# EAGLE board Powerboard (EAGLE 9.6.2)
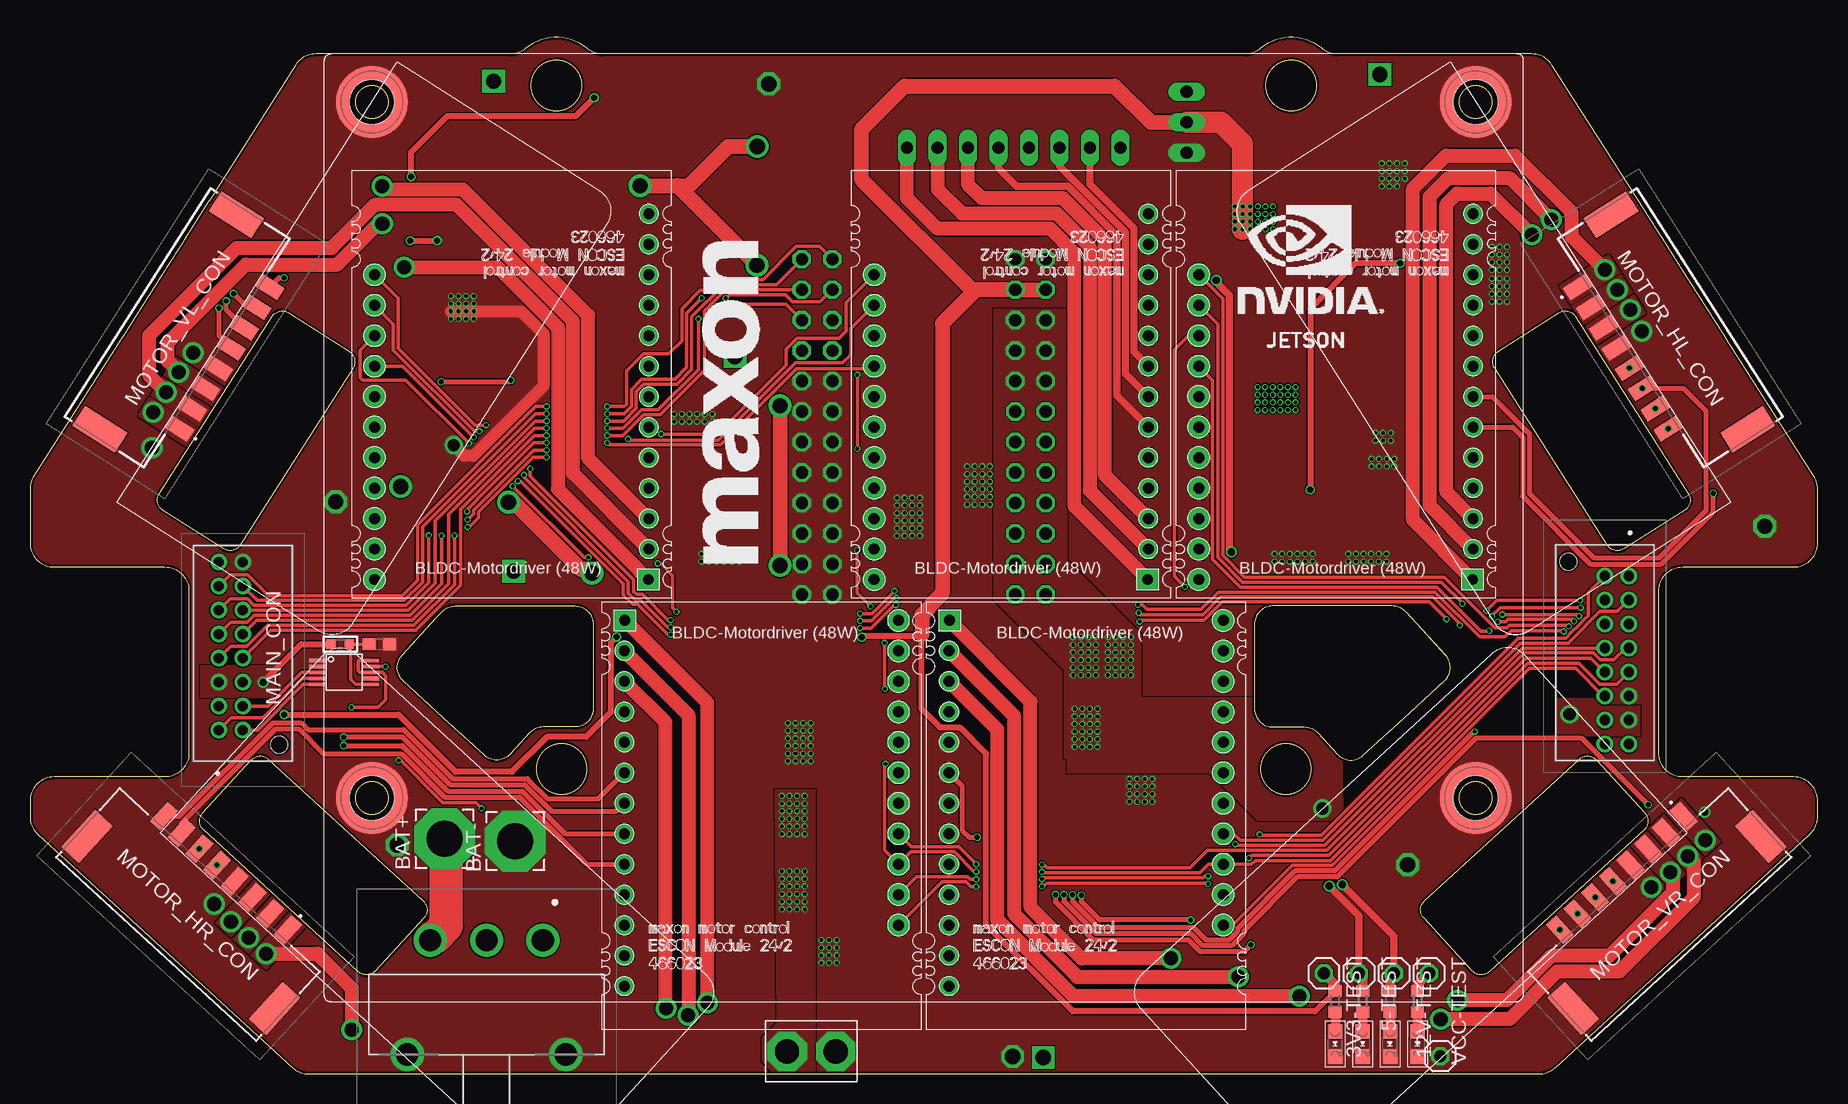
[diagram p0: board, top side]
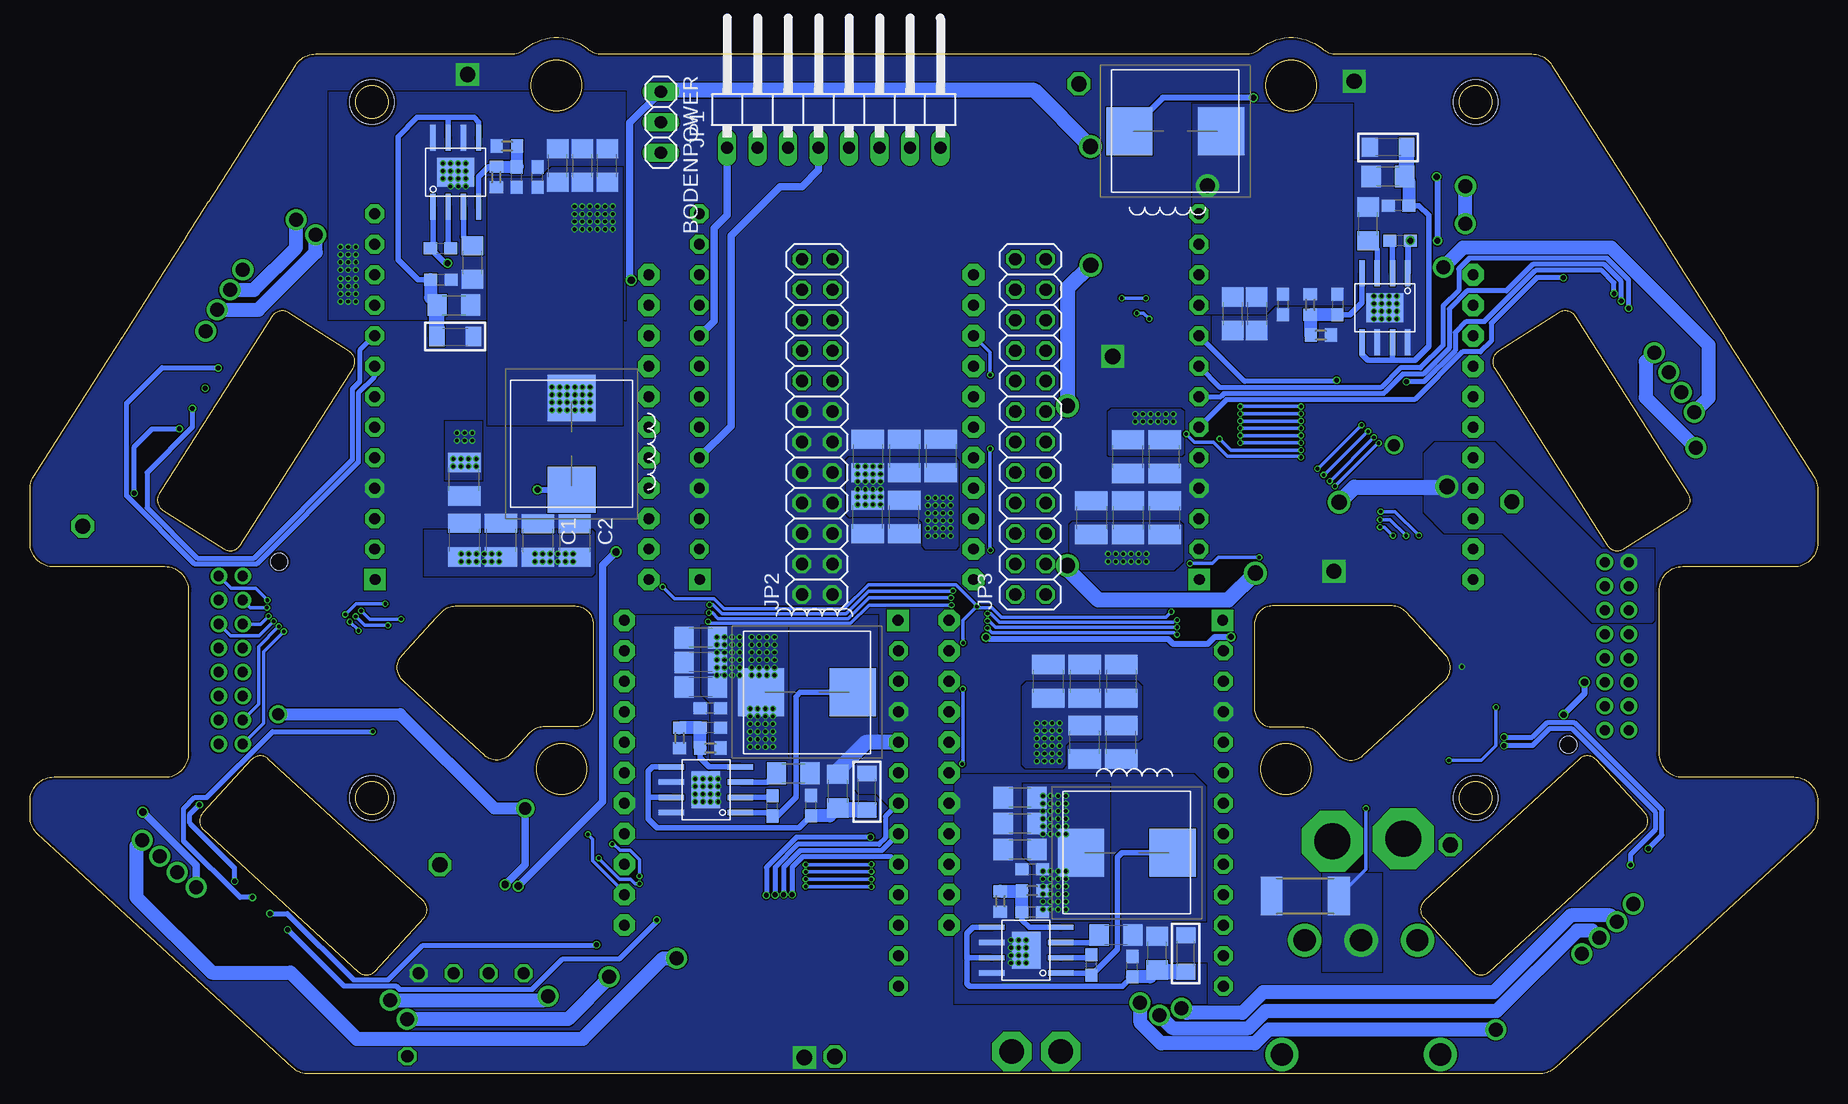
[diagram p1: board, bottom side, seen from below]

Size 149.01 x 86.37 mm. Coordinates in mm from the lower left corner, seen from the top.
Outline: 137.87,66.81 141.34,61.36 arc1 141.37,61.3 148.7,49.81 arc-32 149.01,48.74 149.01,44.25 arc-90 147.01,42.25 137.76,42.25 arc90 135.76,40.25 135.76,26.75 arc90 137.76,24.75 147.01,24.75 arc-90 149.01,22.75 149.01,21.45 arc-48 148.36,19.98 146.01,17.82 127.13,0.52 arc-42 125.78,0 23.23,0 arc-42 21.88,0.52 3,17.82 0.65,19.98 arc-48 0,21.45 0,22.75 arc-90 2,24.75 11.25,24.75 arc90 13.25,26.75 13.25,40.25 arc90 11.25,42.25 2,42.25 arc-90 0,44.25 0,48.74 arc-32 0.31,49.81 7.64,61.3 arc1 7.67,61.36 11.14,66.81
Outline: 137.87,66.81 137.87,66.81
Outline: 137.87,66.81 136.01,69.73 arc0 136.01,69.72 135.96,69.8 arc0 135.97,69.79 134.11,72.71 arc-1 134.09,72.74 126.87,84.08 arc58 125.18,85 108.95,85 arc-40 107.68,85.46 arc79 102.58,85.46 arc-40 101.3,85 47.71,85 arc-40 46.43,85.46 arc79 41.33,85.46 arc-40 40.06,85 23.83,85 arc58 22.14,84.08 14.92,72.74 arc-1 14.9,72.71 13.04,69.79 arc0 13.05,69.8 13,69.72 arc0 13,69.73 11.14,66.81
Outline: 11.14,66.81 11.14,66.81
Outline: 115.14,38 114.68,38.51 arc48 113.57,39 103.57,39 arc90 102.07,37.5 102.07,30.42 arc90 103.57,28.92 106.25,28.92 arc-48 107.35,28.43 109,26.64 arc90 111.12,26.54 114.51,29.66 117.91,32.77 arc90 118,34.88 115.14,38
Outline: 115.14,38 118.01,34.87
Outline: 33.87,38 34.33,38.51 arc-48 35.44,39 45.43,39 arc-90 46.93,37.5 46.93,30.42 arc-90 45.43,28.92 42.76,28.92 arc48 41.66,28.43 40.01,26.64 arc-90 37.89,26.54 34.5,29.66 31.1,32.77 arc-90 31.01,34.88 33.87,38
Outline: 33.87,38 31,34.87
Outline: 116.24,14.42 129.14,26.24 arc-90 130.55,26.18 134.61,21.75 arc-90 134.54,20.34 121.64,8.52 arc-90 120.23,8.58 116.18,13 arc-90 116.24,14.42
Outline: 122.39,60.21 127.45,63.43 arc-90 128.83,63.12 138.23,48.36 arc-90 137.93,46.98 132.87,43.76 arc-90 131.49,44.07 122.08,58.83 arc-90 122.39,60.21
Outline: 21.56,63.43 26.62,60.21 arc-90 26.93,58.83 17.52,44.07 arc-90 16.14,43.76 11.08,46.98 arc-90 10.78,48.36 20.18,63.12 arc-90 21.56,63.43
Outline: 19.87,26.24 32.77,14.42 arc-90 32.83,13 28.78,8.58 arc-90 27.37,8.52 14.47,20.34 arc-90 14.4,21.75 18.46,26.18 arc-90 19.87,26.24
Outline: circle at 105.13,82.38 radius 2.1
Outline: circle at 104.69,25.42 radius 2.1
Outline: circle at 120.5,23 radius 1.38
Outline: circle at 120.5,81 radius 1.38
Outline: circle at 28.5,81 radius 1.38
Outline: circle at 28.5,23 radius 1.38
Outline: circle at 44.32,25.42 radius 2.1
Outline: circle at 43.88,82.38 radius 2.1
Copper layers (1*16): Top 0.035mm / dielectric 1.55mm / Bottom 0.035mm
Design rules "4L_druMCB_Powerboard *": minimum track width 0.1mm, minimum drill 0.2mm, track to track 0.1mm, track to pad 0.1mm, pad to pad 0.1mm, via to via 0.1mm, smd to smd 0mil, copper to edge 0.2mm, drill to drill 0.2mm, minimum pad ring 0.125mm, minimum via ring 0.1mm, stop-mask expansion 2mil, vias tented up to drill 0.45mm, thermal gap 0.2mm
Net classes: 2 power: width 0.406 mm, drill 0.5 mm, clearance 0.15 mm

## Footprints (pad centres in the part's own frame; a part is rotated, then mirrored left to right if it is on the bottom)
1X01 = drill 1.016 octagon: 1 0,0
5,08/3 = drill 3 pad 5.08 octagon: P$1 0,0
1X03 = drill 1.016 long: 1 -2.54,0; 2 0,0; 3 2.54,0
C1210 = smd 1.6 x 2.7: 1 -1.4,0; 2 1.4,0
C0603 = smd 1.1 x 1: 1 -0.85,0; 2 0.85,0
C1206 = smd 1.6 x 1.8: 1 -1.4,0; 2 1.4,0
TIGERS_DGS_S-PDSO-G10 = smd 0.3 x 1.45: 1 -1,-2.2; 2 -0.5,-2.2; 3 0,-2.2; 4 0.5,-2.2; 5 1,-2.2; 6 1,2.2; 7 0.5,2.2; 8 0,2.2; 9 -0.5,2.2; 10 -1,2.2
TIGERS_DDA_R-PDSO-G8 = smd 0.45 x 2.15: 1 -1.905,-2.875; 2 -0.635,-2.875; 3 0.635,-2.875; 4 1.905,-2.875; 5 1.905,2.875; 6 0.635,2.875; 7 -0.635,2.875; 8 -1.905,2.875 | smd 3.1 x 2.4: PAD 0,0
WA-SMSI_9774100151 = smd 6 x 6: 1 0,0 | hole 3.7: 0,0
1X08/90 = drill 1.016 long: 1 -8.89,-3.81; 2 -6.35,-3.81; 3 -3.81,-3.81; 4 -1.27,-3.81; 5 1.27,-3.81; 6 3.81,-3.81; 7 6.35,-3.81; 8 8.89,-3.81
2X12 = drill 1.016 octagon: 1 -13.97,-1.27; 2 -13.97,1.27; 3 -11.43,-1.27; 4 -11.43,1.27; 5 -8.89,-1.27; 6 -8.89,1.27; 7 -6.35,-1.27; 8 -6.35,1.27; 9 -3.81,-1.27; 10 -3.81,1.27; 11 -1.27,-1.27; 12 -1.27,1.27; 13 1.27,-1.27; 14 1.27,1.27; 15 3.81,-1.27; 16 3.81,1.27; 17 6.35,-1.27; 18 6.35,1.27; 19 8.89,-1.27; 20 8.89,1.27; 21 11.43,-1.27; 22 11.43,1.27; 23 13.97,-1.27; 24 13.97,1.27
L0603 = smd 0.8 x 0.8: 1 -0.762,0; 2 0.762,0
L1206 = smd 1.3 x 1.6: 1 -1.524,0; 2 1.524,0
7443251600_WE-HCI_105023 = smd 3.85 x 4: 1 -3.825,0; 2 3.825,0
POWER_DISTRIBUTION_CHIPLED_0805 = smd 1.2 x 1.2: A 0,-1.05; C 0,1.05
501645-1620_5016451620 = drill 0.85 pad 1.381: 1 -5.85,2; 2 -5.85,0; 3 -3.85,2; 4 -3.85,0; 5 -1.85,2; 6 -1.85,0; 7 0.15,2; 8 0.15,0; 9 2.15,2; 10 2.15,0; 11 4.15,2; 12 4.15,0; 13 6.15,2; 14 6.15,0; 15 8.15,2; 16 8.15,0 | hole 1.4: -7.05,-3.05
MOTOR_CON_VERTICAL = smd 1.2 x 2.2: 1 7,4.68; 2 5,4.68; 3 3,4.68; 4 1,4.68; 5 -1,4.68; 6 -3,4.68; 7 -5,4.68; 8 -7,4.68 | smd 2 x 4.2: MP1 10.6,-0.9; MP2 -10.6,-0.9
R2512 = smd 1.8 x 3.2: 1 -2.8,0; 2 2.8,0
R0603 = smd 1 x 1.1: 1 -0.85,0; 2 0.85,0
500SSP1S1M6QEB = drill 1.85 pad 2.775: 1 0,0; 2 0,4.7; 3 0,9.4; MH1 -9.53,-1.905; MH2 -9.53,11.305
MAXON_ESCON24/2_MODULE = drill 0.9 pad 1.575 octagon: +5V 1.905,-14.2; +VCC 1.905,-9.12; A 1.905,-24.36; A/ 1.905,-26.9; B 1.905,-29.44; B/ 1.905,-31.98; GND 1.905,-11.66; H1 1.905,-16.74; H2 1.905,-19.28; H3 1.905,-21.82; MW2/- 1.905,-4.04; MW3/NC 1.905,-6.58 | drill 0.9 pad 1.8 octagon: A_IN1+ 24.765,-1.5; A_IN1− 24.765,-4.04; A_IN2+ 24.765,-6.58; A_IN2− 24.765,-9.12; A_OUT1 24.765,-11.66; A_OUT2 24.765,-14.2; D_IN1 24.765,-19.28; D_IN2 24.765,-21.82; D_IN/D_OUT3 24.765,-24.36; D_IN/D_OUT4 24.765,-26.9; GND2 24.765,-16.74 | drill 0.9 pad 1.8 square: MW1/+ 1.95,-1.5
PWRJACK = drill 2.032 pad 3.302 octagon: P$1 0,2.032; P$2 0,-2.032

## Placement (x,y rotation side)
3V3-TEST  [1X01]  107.85,8.39 270 top
5-TEST  [1X01]  110.78,8.39 270 top
12V-TEST  [1X01]  113.7,8.39 270 top
BAT+  [5,08/3]  34.55,19.59 90 top
BAT-  [5,08/3]  40.44,19.41 90 top
BODENPOWER  [1X03]  96.42,79.3 270 bottom
C1  47uF  [C1210]  106.69,44.46 270 bottom
C2  47uF  [C1210]  103.61,44.46 270 bottom
C6  100n  [C0603]  29.14,35.82 0 top
C7  10u  [C1206]  81.67,23.57 90 bottom
C8  100n  [C0603]  83.9,22.36 90 bottom
C9  10u  [C1206]  85.39,25.06 0 bottom
C10  1u  [C0603]  87.13,22.35 90 bottom
C11  18p  [C0603]  92.28,28.86 180 bottom
C12  33u  [C1206]  93.1,34.3 180 bottom
C13  33u  [C1206]  93.1,32.24 180 bottom
C14  33u  [C1206]  93.1,36.35 180 bottom
C15  100n  [C0603]  92.28,30.49 180 bottom
C16  10u  [C1206]  55.05,10.06 90 bottom
C17  100n  [C0603]  57.13,8.95 90 bottom
C18  10u  [C1206]  58.48,11.59 0 bottom
C19  1u  [C0603]  60.53,9.07 90 bottom
C20  18p  [C0603]  65.46,13.49 180 bottom
C21  33u  [C1206]  66.48,23.02 180 bottom
C22  33u  [C1206]  66.48,20.86 180 bottom
C23  33u  [C1206]  66.48,18.7 180 bottom
C24  100n  [C0603]  65.46,17.05 180 bottom
C25  10u  [C1206]  113.67,64.06 0 bottom
C26  100n  [C0603]  114.76,66.2 0 bottom
C27  10u  [C1206]  112.15,67.62 270 bottom
C28  10u  [C1206]  35.82,74.78 180 bottom
C29  100n  [C0603]  34.93,72.37 180 bottom
C30  10u  [C1206]  37.47,70.85 90 bottom
C31  1u  [C0603]  34.8,69.45 180 bottom
C32  18p  [C0603]  40.01,64.12 270 bottom
C33  33u  [C1206]  46.74,63.35 270 bottom
C34  33u  [C1206]  48.77,63.35 270 bottom
C36  100n  [C0603]  44.58,64.12 270 bottom
C39  47uF  [C1210]  60.53,46.36 270 bottom
C40  47uF  [C1210]  112.81,44.48 270 bottom
C41  47uF  [C1210]  109.76,44.48 270 bottom
C42  47uF  [C1210]  57.49,46.36 270 bottom
C43  47uF  [C1210]  54.44,46.36 270 bottom
C44  47uF  [C1210]  57.49,51.44 90 bottom
C46  47uF  [C1210]  54.44,51.44 90 bottom
C48  47uF  [C1210]  112.81,49.56 90 bottom
C49  47uF  [C1210]  64.14,32.72 270 bottom
C50  47uF  [C1210]  61.09,32.72 270 bottom
C51  47uF  [C1210]  79.18,46.41 90 bottom
C52  47uF  [C1210]  79.18,51.49 270 bottom
C53  47uF  [C1210]  76.13,46.41 90 bottom
C54  47uF  [C1210]  73.08,51.49 270 bottom
C55  47uF  [C1210]  58.05,32.72 270 bottom
C56  47uF  [C1210]  61.09,27.64 90 bottom
C57  47uF  [C1210]  76.13,51.49 270 bottom
C59  1u  [C0603]  114.79,68.81 0 bottom
C60  75p  [C0603]  108.44,74.73 90 bottom
C61  47u  [C1206]  100.9,75.7 90 bottom
C62  47u  [C1206]  102.95,75.7 90 bottom
C63  47u  [C1206]  105.01,75.7 90 bottom
C64  100n  [C0603]  106.71,74.73 90 bottom
C73  47uF  [C1210]  58.05,27.64 90 bottom
GND_PH  [1X01]  117.56,1.48 0 top
IC3  POWER_INA226  [TIGERS_DGS_S-PDSO-G10]  26.19,33.46 270 top
IC4  LMR23630ADDA  [TIGERS_DDA_R-PDSO-G8]  92.67,23.69 90 bottom
IC5  LMR23630ADDA  [TIGERS_DDA_R-PDSO-G8]  65.97,10.32 90 bottom
IC6  LMR23630ADDA  [TIGERS_DDA_R-PDSO-G8]  113.52,75.14 0 bottom
IC7  LMR23630ADDA  [TIGERS_DDA_R-PDSO-G8]  36.07,63.86 180 bottom
JETSON_MH1  M2.5 x 10mm  [WA-SMSI_9774100151]  28.5,81 0 top
JETSON_MH2  M2.5 x 10mm  [WA-SMSI_9774100151]  28.5,23 0 top
JETSON_MH3  M2.5 x 10mm  [WA-SMSI_9774100151]  120.5,81 0 top
JETSON_MH4  M2.5 x 10mm  [WA-SMSI_9774100151]  120.5,23 0 top
JP1  [1X08/90]  82,81 0 bottom
JP2  [2X12]  83.39,53.93 90 bottom
JP3  [2X12]  65.61,53.93 90 bottom
L1  120R  [L0603]  25.86,35.82 180 top
L2  470R  [L1206]  79.24,23.53 270 bottom
L3  7443251600  [7443251600_WE-HCI_105023]  84.25,31.8 180 bottom
L4  470R  [L1206]  52.66,10.04 270 bottom
L5  7443251600  [7443251600_WE-HCI_105023]  57.59,18.45 180 bottom
L6  470R  [L1206]  113.57,61.45 180 bottom
L7  470R  [L1206]  35.79,77.22 0 bottom
L8  7443251600  [7443251600_WE-HCI_105023]  53.55,78.57 0 bottom
L9  7443251600  [7443251600_WE-HCI_105023]  103.87,52.51 90 bottom
LED1  RED  [POWER_DISTRIBUTION_CHIPLED_0805]  115.65,2.49 180 top
LED2  BLUE  [POWER_DISTRIBUTION_CHIPLED_0805]  113.37,2.49 180 top
LED3  YELLOW  [POWER_DISTRIBUTION_CHIPLED_0805]  111.08,2.49 180 top
LED4  GREEN  [POWER_DISTRIBUTION_CHIPLED_0805]  108.79,2.49 180 top
MAIN_CON  TEENSY_CON_VERTICAL  [501645-1620_5016451620]  17.74,34.5 90 top
MAIN_CON_MOT  TEENSY_CON_VERTICAL  [501645-1620_5016451620]  131.27,35.64 270 top
MOTOR_HL_CON  [MOTOR_CON_VERTICAL]  136.73,62.19 122.5 top
MOTOR_HR_CON  [MOTOR_CON_VERTICAL]  13.16,13.29 317.5 top
MOTOR_VL_CON  [MOTOR_CON_VERTICAL]  12.27,62.19 237.5 top
MOTOR_VR_CON  [MOTOR_CON_VERTICAL]  135.85,13.29 42.5 top
R9  0R002  [R2512]  42.7,14.81 180 bottom
R10  243k 1%  [R0603]  92.28,27.16 0 bottom
R11  22k1 1%  [R0603]  94.86,27.99 90 bottom
R12  243k 1%  [R0603]  65.46,15.27 0 bottom
R13  22k1 1%  [R0603]  68.13,14.38 90 bottom
R14  51k 1%  [R0603]  110.14,74.73 270 bottom
R15  88k7 1%  [R0603]  42.3,64.12 90 bottom
R16  22k1 1%  [R0603]  41.41,61.58 180 bottom
R26  22k1 1%  [R0603]  109.25,77.32 0 bottom
R32  1k  [R0603]  108.79,6.05 90 top
R33  1k  [R0603]  111.08,6.05 90 top
R34  10k  [R0603]  113.37,6.05 90 top
R35  10k  [R0603]  115.65,6.05 90 top
S1  500SSP1S1M6QEB  [500SSP1S1M6QEB]  42.75,11.15 90 top
U$1  MAXON_ESCON24/2  [MAXON_ESCON24/2_MODULE]  47.63,39.3 0 top
U$2  MAXON_ESCON24/2  [MAXON_ESCON24/2_MODULE]  74.7,39.3 0 top
U$3  MAXON_ESCON24/2  [MAXON_ESCON24/2_MODULE]  53.48,39.7 180 top
U$4  MAXON_ESCON24/2  [MAXON_ESCON24/2_MODULE]  122.19,39.7 180 top
U$5  JETSON_ORIN-PWRJACK  [PWRJACK]  65.13,1.89 270 top
U$6  MAXON_ESCON24/2  [MAXON_ESCON24/2_MODULE]  95.12,39.7 180 top
U$10  MAXON_LOGO  [MAXON_LOGO]  60.81,42.6 90 top
U$11  NVIDIA-LOGO  [NVIDIA-LOGO]  85.93,54.77 0 top
VCC-TEST  [1X01]  116.62,8.39 270 top

## Library data of the parts
3V3-TEST 5-TEST 12V-TEST BODENPOWER GND_PH JP1-JP3 VCC-TEST = pinhead
BAT+ BAT- = TIGERs
C1 C2 C6 C8 C10 C11 C15 C17 C19 C20 C24 C26 C29 C31 C32 C36 C39-C44 C46 C48-C57 C59 C60 C64 C73 = rcl; SPICEPREFIX: C
C7 C9 C16 C18 C25 C27 C28 C30 = rcl; SPICEPREFIX: C; VOLTAGE: 50V
C12-C14 C21-C23 C33 C34 C61-C63 = rcl; SPICEPREFIX: C; VOLTAGE: 25V
IC3-IC7 MOTOR_HL_CON MOTOR_HR_CON MOTOR_VL_CON MOTOR_VR_CON = Open24
JETSON_MH1-JETSON_MH4 = Open24; DATASHEET-URL: https://www.we-online.com/catalog/datasheet/9774100151R.pdf; INNER-DIAMETER: 3.5mm; INNER-THREAD-LENGTH: -; OUTER-DIAMETER: 5.1mm; PART-NUMBER: 9774100151R; PIN-LENGTH: 10mm; THREAD: M2.5
L1 = rc-master-smd
L2 L4 L6 L7 = rc-master-smd; IMAX: 4A
L3 L5 L8 L9 = Open24; DESCRIPTION: SMD-Flat Wire High Current Inductor WE-HCI; HEIGHT: mm; MANUFACTURER_NAME: Wurth Elektronik; MANUFACTURER_PART_NUMBER: 7443251600; MOUSER_PART_NUMBER: 710-7443251600; MOUSER_PRICE-STOCK: https://www.mouser.co.uk/ProductDetail/Wurth-Elektronik/7443251600?qs=VxkwJfKV0FSkbbPOgC7FsA%3D%3D
LED1-LED4 = Open24; MF: Würth Elektronik; MPN: 150080RS75000
MAIN_CON MAIN_CON_MOT = Open24; DESCRIPTION: MOLEX - 501645-1620 - CONNECTOR, HEADER, 16POS, 2ROW, 2MM; HEIGHT: 12mm; MANUFACTURER_NAME: Molex; MANUFACTURER_PART_NUMBER: 501645-1620; MOUSER_PART_NUMBER: 538-501645-1620; MOUSER_PRICE-STOCK: https://www.mouser.co.uk/ProductDetail/Molex/501645-1620?qs=AcmJtBVhzkSktNjjA6%2Faug%3D%3D
R9-R16 R26 R32-R35 = rcl; SPICEPREFIX: R
S1 = schalter; DESCRIPTION: SLIDE, 5A 120VAC/28VDC, SPDT On-On, Through Hole, Right Angle PC Pin; HEIGHT: 6.1mm; MANUFACTURER_NAME: E-Switch; MANUFACTURER_PART_NUMBER: 500SSP1S1M6QEB; MOUSER_PART_NUMBER: 612-500SSP1S1M6QEB; MOUSER_PRICE-STOCK: https://www.mouser.co.uk/ProductDetail/E-Switch/500SSP1S1M6QEB?qs=0JU57JYmZjtvO38dJ0sbfg%3D%3D
U$1-U$4 U$6 = Motortreiber_MaxonESCON24-2
U$5 = Power
U$10 U$11 = Sponsorenlogos

## Nets
+3V3: 3V3-TEST.1 BODENPOWER.2 C60.1 C61.1 C62.1 C63.1 C64.1 JP2.21 JP2.22 L1.2 L9.2 MAIN_CON.5 R14.2 R32.2
+5V: 5-TEST.1 BODENPOWER.1 C32.1 C33.1 C34.1 C36.1 L8.2 MAIN_CON.15 R15.2 R33.2
+12V: 12V-TEST.1 C11.1 C12.1 C13.1 C14.1 C15.1 JP2.15 JP2.16 JP2.17 JP2.18 JP2.19 JP2.20 L3.2 MAIN_CON_MOT.13 R10.2 R34.2
ALRT: IC3.3 MAIN_CON.4
BAT_SENSE2: IC3.8 IC3.10 R9.1 S1.2
BOOT_5V: C31.2 IC7.2
BOOT_12V_1: C10.2 IC4.2
BOOT_12V_2: C19.2 IC5.2
BOOT_12V_4: C59.2 IC6.2
CHIP: JP3.21 MAIN_CON.8
DRIBBLER_DIR: MAIN_CON.9 U$6.D_IN/D_OUT3
DRIBBLER_DOUT: MAIN_CON.7 U$6.D_IN/D_OUT4
DRIBBLER_PWM: MAIN_CON.11 U$6.D_IN1
DRIVE_EN: MAIN_CON_MOT.9 U$1.D_IN2 U$2.D_IN2 U$3.D_IN2 U$4.D_IN2 U$6.D_IN2
EN_HV: JP3.23 MAIN_CON.12
FB_3V3: C60.2 IC6.4 R14.1 R26.2
FB_5V: C32.2 IC7.4 R15.1 R16.2
FB_12V_1: C11.2 IC4.4 R10.1 R11.2
FB_12V_2: C20.2 IC5.4 R12.1 R13.2
GND: BAT-.P$1 BODENPOWER.3 C1.2 C2.2 C6.2 C7.2 C8.2 C9.2 C12.2 C13.2 C14.2 C15.2 C16.2 C17.2 C18.2 C21.2 C22.2 C23.2 C24.2 C25.2 C26.2 C27.2 C28.2 C29.2 C30.2 C33.2 C34.2 C36.2 C39.2 C40.2 C41.2 C42.2 C43.2 C44.2 C46.2 C48.2 C49.2 C50.2 C51.2 C52.2 C53.2 C54.2 C55.2 C56.2 C57.2 C61.2 C62.2 C63.2 C64.2 C73.2 GND_PH.1 IC3.1 IC3.2 IC3.7 IC4.6 IC4.8 IC4.PAD IC5.6 IC5.8 IC5.PAD IC6.6 IC6.8 IC6.PAD IC7.6 IC7.8 IC7.PAD JETSON_MH1.1 JETSON_MH2.1 JETSON_MH3.1 JETSON_MH4.1 JP2.23 JP2.24 JP3.1 JP3.2 JP3.3 JP3.4 JP3.5 JP3.6 JP3.7 JP3.8 JP3.9 JP3.10 JP3.11 JP3.12 JP3.13 JP3.14 JP3.15 JP3.16 LED1.C LED2.C LED3.C LED4.C MAIN_CON.16 MAIN_CON_MOT.11 MOTOR_HL_CON.4 MOTOR_HR_CON.4 MOTOR_VL_CON.4 MOTOR_VR_CON.4 R11.1 R13.1 R16.1 R26.1 S1.MH1 S1.MH2 U$1.GND U$1.GND2 U$2.GND U$2.GND2 U$3.GND U$3.GND2 U$4.GND U$4.GND2 U$5.P$1 U$6.GND2
HV_SENSING: JP3.24 MAIN_CON.13
I2C_SCL: IC3.5 MAIN_CON.2
I2C_SDA: IC3.4 MAIN_CON.1
JETSON_SUP: C20.1 C21.1 C22.1 C23.1 C24.1 L5.2 R12.2 U$5.P$2
LED_KICKERBOARD: JP3.22 MAIN_CON.14
LINEAR: JP3.19 MAIN_CON.10
M_HL_AOUT1: U$4.A_OUT1
M_HL_AOUT2: U$4.A_OUT2
M_HL_DIR: MAIN_CON_MOT.6 U$4.D_IN/D_OUT3
M_HL_DOUT: MAIN_CON_MOT.14 U$4.D_IN/D_OUT4
M_HL_PWM: MAIN_CON_MOT.5 U$4.D_IN1
M_HR_AOUT1: U$1.A_OUT1
M_HR_AOUT2: U$1.A_OUT2
M_HR_DIR: MAIN_CON_MOT.8 U$1.D_IN/D_OUT3
M_HR_DOUT: MAIN_CON_MOT.10 U$1.D_IN/D_OUT4
M_HR_PWM: MAIN_CON_MOT.7 U$1.D_IN1
M_VL_AOUT1: U$3.A_OUT1
M_VL_AOUT2: U$3.A_OUT2
M_VL_DIR: MAIN_CON_MOT.4 U$3.D_IN/D_OUT3
M_VL_DOUT: MAIN_CON_MOT.16 U$3.D_IN/D_OUT4
M_VL_PWM: MAIN_CON_MOT.1 U$3.D_IN1
M_VR_AOUT1: U$2.A_OUT1
M_VR_AOUT2: U$2.A_OUT2
M_VR_DIR: MAIN_CON_MOT.2 U$2.D_IN/D_OUT3
M_VR_DOUT: MAIN_CON_MOT.12 U$2.D_IN/D_OUT4
M_VR_PWM: MAIN_CON_MOT.3 U$2.D_IN1
MOTOR_D_A: JP1.8 U$6.MW1/+
MOTOR_D_B: JP1.7 U$6.MW2/-
MOTOR_D_C: JP1.6 U$6.MW3/NC
MOTOR_D_H1: JP1.3 U$6.H1
MOTOR_D_H2: JP1.2 U$6.H2
MOTOR_D_H3: JP1.1 U$6.H3
MOTOR_D_VHALL: JP1.5 U$6.+5V
MOTOR_HL_A: MOTOR_HL_CON.1 U$4.MW1/+
MOTOR_HL_B: MOTOR_HL_CON.2 U$4.MW2/-
MOTOR_HL_C: MOTOR_HL_CON.3 U$4.MW3/NC
MOTOR_HL_H1: MOTOR_HL_CON.6 U$4.H1
MOTOR_HL_H2: MOTOR_HL_CON.5 U$4.H2
MOTOR_HL_H3: MOTOR_HL_CON.7 U$4.H3
MOTOR_HL_VHALL: MOTOR_HL_CON.8 U$4.+5V
MOTOR_HR_A: MOTOR_HR_CON.1 U$1.MW1/+
MOTOR_HR_B: MOTOR_HR_CON.2 U$1.MW2/-
MOTOR_HR_C: MOTOR_HR_CON.3 U$1.MW3/NC
MOTOR_HR_H1: MOTOR_HR_CON.6 U$1.H1
MOTOR_HR_H2: MOTOR_HR_CON.5 U$1.H2
MOTOR_HR_H3: MOTOR_HR_CON.7 U$1.H3
MOTOR_HR_VHALL: MOTOR_HR_CON.8 U$1.+5V
MOTOR_VL_A: MOTOR_VL_CON.1 U$3.MW1/+
MOTOR_VL_B: MOTOR_VL_CON.2 U$3.MW2/-
MOTOR_VL_C: MOTOR_VL_CON.3 U$3.MW3/NC
MOTOR_VL_H1: MOTOR_VL_CON.6 U$3.H1
MOTOR_VL_H2: MOTOR_VL_CON.5 U$3.H2
MOTOR_VL_H3: MOTOR_VL_CON.7 U$3.H3
MOTOR_VL_VHALL: MOTOR_VL_CON.8 U$3.+5V
MOTOR_VR_A: MOTOR_VR_CON.1 U$2.MW1/+
MOTOR_VR_B: MOTOR_VR_CON.2 U$2.MW2/-
MOTOR_VR_C: MOTOR_VR_CON.3 U$2.MW3/NC
MOTOR_VR_H1: MOTOR_VR_CON.6 U$2.H1
MOTOR_VR_H2: MOTOR_VR_CON.5 U$2.H2
MOTOR_VR_H3: MOTOR_VR_CON.7 U$2.H3
MOTOR_VR_VHALL: MOTOR_VR_CON.8 U$2.+5V
N$1: BAT+.P$1 S1.3
N$4: LED1.A R35.1
N$7: JP1.4 U$6.GND
N$14: LED4.A R32.1
N$15: LED3.A R33.1
N$30: LED2.A R34.1
SW_3V3: C59.1 IC6.1 L9.1
SW_5V: C31.1 IC7.1 L8.1
SW_12V_1: C10.1 IC4.1 L3.1
SW_12V_2: C19.1 IC5.1 L5.1
V_INA: C6.1 IC3.6 L1.1
VCC: C1.1 C2.1 C39.1 C40.1 C41.1 C42.1 C43.1 C44.1 C46.1 C48.1 C49.1 C50.1 C51.1 C52.1 C53.1 C54.1 C55.1 C56.1 C57.1 C73.1 IC3.9 JP2.1 JP2.2 JP2.3 JP2.4 JP2.5 JP2.6 JP2.7 JP2.8 JP2.9 JP2.10 JP2.11 JP2.12 JP2.13 JP2.14 L2.1 L4.1 L6.1 L7.1 R9.2 R35.2 U$1.+VCC U$2.+VCC U$3.+VCC U$4.+VCC U$6.+VCC VCC-TEST.1
VCC_3V3: C27.1 IC6.3
VCC_5V: C30.1 IC7.3
VCC_12V_1: C9.1 IC4.3
VCC_12V_2: C18.1 IC5.3
VIN_3V3: C25.1 C26.1 IC6.5 IC6.7 L6.2
VIN_5V: C28.1 C29.1 IC7.5 IC7.7 L7.2
VIN_12V_1: C7.1 C8.1 IC4.5 IC4.7 L2.2
VIN_12V_2: C16.1 C17.1 IC5.5 IC5.7 L4.2

## Tracks (layer width: path | path; a pad name or v marks a point on that pad's centre or on a via)
+3V3  (via drill 0.3, 0.51, 0.61)
  Top 0.508: v19.44,32.64 22.61,35.82 L1.2 | v21.18,29.95 30.72,29.95 35.49,25.18 40.16,25.18 43.08,28.1 46.37,28.1 48.4,30.13 48.4,35.91 v48.9,36.42 | 74.35,36.61 74.28,36.53 | v69.33,36.39 69.47,36.53 74.28,36.53 | R32.2 107.11,5.21 86.92,5.21 79.69,12.44 79.69,26.7 77.5,28.89 75.85,28.89 74.28,30.46 74.28,36.53
  Top 0.813: 3V3-TEST.1 108.79,7.45 R32.2
  Top 1.27: JP2.22 JP2.21 78.86,65.36 78.67,65.17 | 78.67,65.17 69.32,74.52 69.32,78.75 72.9,82.33 90.4,82.33 93.43,79.31 BODENPOWER.2 | 78.67,65.17 76.05,62.55 76.05,40.04 75.02,39 75.02,38.95 74.35,38.28 74.35,36.61
  Top 1.778: BODENPOWER.2 99.27,79.31 101.07,77.5 v101.07,70.39
  Bottom 0.508: v19.44,32.64 19.44,31.69 v21.18,29.95 | v69.33,36.39 69.15,36.39 69.02,36.26 54.14,36.26 53.73,35.84 50.83,35.84 50.26,36.42 v48.9,36.42
  other vias: 105.49,57.23 104.86,57.23 105.49,56.6 104.86,56.6 104.22,56.6 103.59,56.6 102.95,56.6 102.32,56.6 102.95,57.23 102.32,57.23 104.22,57.23 103.59,57.23 105.49,55.96 104.86,55.96 105.49,55.33 104.86,55.33 104.22,55.33 103.59,55.33 102.95,55.33 102.32,55.33 102.95,55.96 102.32,55.96 104.22,55.96 103.59,55.96 103.61,72.29 102.98,72.29 103.61,71.66 102.98,71.66 102.34,71.66 101.71,71.66 101.07,71.66 100.44,71.66 101.07,72.29 100.44,72.29 102.34,72.29 101.71,72.29 103.61,71.02 102.98,71.02 103.61,70.39 102.98,70.39 102.34,70.39 101.71,70.39 100.44,70.39 101.07,71.02 100.44,71.02 102.34,71.02 101.71,71.02
  pour Bottom (no thermals): 110.85,74.63 110.85,54.08 99.63,54.08 99.63,75.52 105.52,75.52 106.41,74.63
  pour Top (no thermals): 14.18,34.02 14.18,31.37 20.55,31.37 20.55,34.02
+5V  (via drill 0.61, 1.27)
  Top 0.61: v108.3,15.66 110.78,13.18 5-TEST.1 | v98.89,66.15 98.89,65.99 100,64.88 100,43.65 v100.15,43.5
  Top 0.813: 5-TEST.1 111.08,8.08 R33.2
  Top 1.27: v60.62,77.28 58.19,77.28 54.92,74.02 v50.86,74.02 53.97,74.02 v60.59,67.4 | v62.53,55.7 v62.53,42.37 | v46.86,41.74 46.55,42.05 45.91,42.05 40.33,47.63 v39.88,47.63
  Bottom 0.61: v108.3,15.66 101.28,22.68 101.28,42.37 v100.15,43.5 | v98.89,66.15 99.02,66.28 99.02,79.25 BODENPOWER.1
  Bottom 1.27: v30.89,48.95 30.94,48.9 38.62,48.9 v39.88,47.63 | v60.62,77.28 65.3,81.96 96.31,81.96 BODENPOWER.1 | v60.59,67.4 62.53,65.46 v62.53,55.7 | v62.53,42.37 62.53,42.05 59.98,39.5 49.1,39.5 v46.86,41.74
  pour Bottom (no thermals): 38.74,64.12 38.74,80.8 52.1,80.8 52.1,63.35 45.98,63.35 45.22,64.12
  pour Bottom (no thermals): 13.65,43.77 13.65,37.83 13.87,37.6 18.73,37.6 26.19,45.07 31.07,45.07 32.8,46.79 32.8,51.72 31.86,52.66 26.96,52.66 18.07,43.77
+12V  (via drill 0.3, 0.61, 1.02)
  Top 0.61: v109.4,15.78 113.7,11.48 12V-TEST.1
  Top 0.813: 12V-TEST.1 113.37,8.06 R34.2
  Bottom 0.61: v107.73,22.13 107.73,17.45 v109.4,15.78
  Bottom 1.016: v128.33,29.98 118.14,29.98 110.29,22.13 v107.73,22.13
  other vias: 88.98,27.26 88.98,27.89 88.35,27.26 88.35,27.89 88.35,28.53 88.35,29.16 88.35,29.8 88.35,30.44 88.98,29.8 88.98,30.44 88.98,28.53 88.98,29.16 87.71,27.26 87.71,27.89 87.08,27.26 87.08,27.89 87.08,28.53 87.08,29.16 87.08,29.8 87.08,30.44 87.71,29.8 87.71,30.44 87.71,28.53 87.71,29.16 88.86,33.23 88.86,33.86 88.22,33.23 88.22,33.86 88.22,34.5 88.22,35.13 88.22,35.77 88.22,36.4 88.86,35.77 88.86,36.4 88.86,34.5 88.86,35.13 87.59,33.23 87.59,33.86 86.95,33.23 86.95,33.86 86.95,34.5 86.95,35.13 86.95,35.77 86.95,36.4 87.59,35.77 87.59,36.4 87.59,34.5 87.59,35.13 91.75,33.23 91.75,33.86 91.12,33.23 91.12,33.86 91.12,34.5 91.12,35.13 91.12,35.77 91.12,36.4 91.75,35.77 91.75,36.4 91.75,34.5 91.75,35.13 90.48,33.23 90.48,33.86 89.85,33.23 89.85,33.86 89.85,34.5 89.85,35.13 89.85,35.77 89.85,36.4 90.48,35.77 90.48,36.4 90.48,34.5 90.48,35.13
  pour Bottom (no thermals): 92.28,26.37 85.81,26.37 85.81,37.29 93.05,37.29 93.05,31.7 92.28,30.94
  pour Top (no thermals): 80.3,63.73 80.3,39.58 86.19,33.69 86.19,26.29 92.64,26.29 92.64,36.58 86.47,42.75 86.47,63.73
  pour Top (no thermals): 86.49,31.37 109.4,31.37 109.4,25.02 109.43,21.09 102.35,21.09 98.41,25.04 86.49,25.08
  pour Top (no thermals): 134.25,28.2 134.25,30.64 130.99,30.64 130.36,31.27 127.25,31.27 127.25,28.2
ALRT
  Top 0.305: IC3.3 22.64,33.46 19.84,30.65 MAIN_CON.4
BAT_SENSE2  (via drill 0.3)
  Top 0.305: IC3.10 27.4,34.46 27.34,34.4 27.34,33.59 27.46,33.46 IC3.8 29.39,33.46 29.65,33.2 29.65,31.17 29.03,30.56 v26.8,30.56 | v37.65,22.13 37.17,22.61 34.39,22.61 30.88,26.13 v30.73,26.13
  Bottom 0.305: R9.1 37.65,17.07 v37.65,22.13 | v30.73,26.13 28.04,26.13 26.8,27.36 v26.8,30.56
  pour Bottom (no thermals): 36.3,8.54 36.3,16.69 41.28,16.69 41.28,8.54
BOOT_5V
  Bottom 0.457: IC7.2 35.44,69.23 C31.2
BOOT_12V_1
  Bottom 0.457: IC4.2 87.28,23.05 C10.2
BOOT_12V_2
  Bottom 0.457: C19.2 60.77,9.68 IC5.2
BOOT_12V_4
  Bottom 0.457: IC6.2 114.15,69.03 C59.2
CHIP  (via drill 0.3)
  Top 0.305: MAIN_CON.8 20.07,36.99 32.16,36.99 35.89,40.72 35.89,47.07 42.03,53.2 v43.06,53.2 | v48.12,53.2 49.41,53.2 51.15,54.94 52.53,54.94 56.24,58.65 56.24,63.61 57.99,65.36 JP3.21
  Bottom 0.305: v43.06,53.2 v48.12,53.2
DRIBBLER_DIR  (via drill 0.3)
  Top 0.305: MAIN_CON.9 16.73,37.64 18.1,37.64 18.69,38.23 31.69,38.23 34.3,40.84 v34.3,44.84 | U$6.D_IN/D_OUT3 68.43,62.13 68.43,59.95 67.75,59.26 63.8,59.26 57.36,52.83 49.95,52.83 v49.85,52.92 | v43.06,51.99 41.96,51.99 36.96,46.99 36.96,46.67 v36.48,46.18
  Bottom 0.305: v49.85,52.92 48.92,51.99 v43.06,51.99 | v36.48,46.18 36.47,46.19 35.65,46.19 v34.3,44.84
DRIBBLER_DOUT  (via drill 0.3)
  Top 0.305: MAIN_CON.7 16.73,35.64 18.07,35.64 19.83,37.39 32,37.39 35.39,40.78 v35.39,44.86 | U$6.D_IN/D_OUT4 68.03,64.27 68.03,61.91 67.42,61.29 63.92,61.29 63.02,60.39 63.02,59.06 57.29,53.33 v52.62,53.33 | v36.48,45.57 36.6,45.57 37.39,46.36 37.39,46.85 41.93,51.39 v43.06,51.39
  Bottom 0.305: v52.62,53.33 51.93,52.63 50.35,52.63 49.2,51.49 43.16,51.49 v43.06,51.39 | v35.39,44.86 36.1,45.58 v36.47,45.58 v36.48,45.57
DRIBBLER_PWM  (via drill 0.3)
  Top 0.305: MAIN_CON.11 16.68,39.59 18.13,39.59 18.66,39.06 31.37,39.06 33.24,40.93 v33.24,44.88 | U$6.D_IN1 70.13,58.75 63.89,58.75 57.55,52.42 48.3,52.42 v48.12,52.6 | v36.43,46.87 36.43,47.03 38.2,48.8 42,52.6 v43.06,52.6
  Bottom 0.305: v36.43,46.87 35.23,46.87 v33.24,44.88 | v43.06,52.6 v48.12,52.6
DRIVE_EN  (via drill 0.3)
  Top 0.305: MAIN_CON_MOT.9 132.26,32.48 130.86,32.48 129.09,34.24 124.86,34.24 108.4,17.79 102.14,17.79 101.83,17.48 U$2.D_IN2 98.23,17.48 97.51,16.77 84.43,16.77 v84.35,16.84 | v78.88,16.87 78.7,16.87 77.05,18.52 73.44,18.52 U$1.D_IN2 71.25,18.63 71.25,25.78 v71.31,25.84 | U$3.D_IN2 27.52,60.32 27.52,58.02 27.72,57.82 31.33,57.82 v36.58,52.56 | v52.32,42.54 52.54,42.54 53.55,41.53 53.55,38.85 v53.88,38.52 | v46.55,43.04 46.18,43.04 v40.24,48.98 | U$4.D_IN2 96.57,61.52 95.38,60.33 95.38,41.48 v96.27,40.59 | v68.94,43.64 68.94,40.09 v70.07,38.96 | v71.25,32.09 71.25,35.74 71.25,35.9 v71.22,35.92 | v68.97,52.1 v68.97,58.25
  Bottom 0.305: v84.35,16.84 84.33,16.87 v78.88,16.87 | v70.07,38.96 71.22,37.81 v71.22,35.92 | v52.32,42.54 50.44,42.54 49.94,43.04 v46.55,43.04 | U$6.D_IN2 68.97,60.13 v68.97,58.25 | v70.07,38.96 70.07,39.01 71.84,40.77 79.13,40.77 81.14,38.76 91.15,38.76 91.99,39.6 95.28,39.6 v96.27,40.59 | v70.07,38.96 69.98,38.87 68.84,38.87 68.03,38.06 54.34,38.06 v53.88,38.52 | v68.97,52.1 68.97,43.67 v68.94,43.64 | v71.25,32.09 71.25,30.66 71.25,25.84 v71.31,25.84 | v36.58,52.56 36.66,52.56 v40.24,48.98
EN_HV  (via drill 0.3)
  Top 0.305: MAIN_CON.12 31.53,38.65 33.76,40.88 33.76,46.08 42.09,54.41 v43.06,54.41 | JP3.23 62.23,65.79 57.85,65.79 55.15,63.09 55.15,58.71 53.92,57.48 51.15,57.48 50.54,56.87 50.54,55.48 49.48,54.41 v48.12,54.41
  Bottom 0.305: v43.06,54.41 v48.12,54.41
FB_3V3
  Bottom 0.457: IC6.4 111.61,74.76 110.79,75.58 R14.1
  Bottom 1.003: R14.1 C60.2 | 108.4,75.62 R26.2
  Bottom 1.092: C60.2 108.4,75.62
FB_5V
  Bottom 0.457: C32.2 39,63.27 37.98,64.28 IC7.4
  Bottom 1.092: C32.2 R15.1 42.26,63.23 R16.2
FB_12V_1
  Bottom 0.457: IC4.4 92.39,25.59 93.13,26.33 R10.1
  Bottom 1.092: R10.1 C11.2 93.15,28.84 R11.2
FB_12V_2
  Bottom 0.457: IC5.4 65.72,12.22 66.31,12.82 C20.2
  Bottom 1.092: C20.2 R12.1 66.35,15.23 R13.2
GND  (via drill 0.3, 0.61, 1.02, 1.17, 1.27)
  Top 1.016: v35.08,63.56 v36.99,63.56 40.95,63.56 42.81,61.7 42.81,57.35 36.98,51.52 36.2,51.52 v35.31,52.4
  Bottom 0.61: v135.14,15.55 135.14,17.41 139.55,21.82 v139.6,21.82
  Bottom 1.168: v13.62,60.08 14.33,59.37 14.33,56.37 v10.17,52.2
  Bottom 1.27: U$2.GND 79.33,27.64 81.67,25.3 C7.2
  other vias: 134.34,61.89 15.37,14.16 114.59,75.24 113.95,75.24 113.32,75.24 112.68,75.24 113.32,75.88 112.68,75.88 114.59,75.88 113.95,75.88 113.95,73.97 113.32,73.97 112.68,73.97 113.32,74.61 112.68,74.61 114.59,74.61 113.95,74.61 92.92,22.69 92.92,23.32 92.92,23.96 92.92,24.59 93.55,23.96 93.55,24.59 93.55,22.69 93.55,23.32 91.65,22.69 91.65,23.32 91.65,23.96 91.65,24.59 92.28,23.96 92.28,24.59 92.28,22.69 92.28,23.32 66.61,9.25 66.61,9.89 66.61,10.52 66.61,11.16 67.24,10.52 67.24,11.16 67.24,9.25 67.24,9.89 65.97,10.52 65.97,11.16 65.97,9.25 65.97,9.89 36.35,62.92 36.35,63.56 36.35,64.19 36.35,64.83 36.99,64.19 36.99,64.83 36.99,62.92 35.08,62.92 35.08,64.19 35.08,64.83 35.72,64.19 35.72,64.83 35.72,62.92 35.72,63.56 65.08,26.07 65.08,26.7 64.45,26.07 64.45,26.7 64.45,27.34 64.45,27.97 64.45,28.61 64.45,29.24 65.08,28.61 65.08,29.24 65.08,27.34 65.08,27.97 63.81,26.07 63.81,26.7 63.18,26.07 63.18,26.7 63.18,27.34 63.18,27.97 63.18,28.61 63.18,29.24 63.81,28.61 63.81,29.24 63.81,27.34 63.81,27.97 74.17,44.84 74.17,45.47 73.54,44.84 73.54,45.47 73.54,46.11 73.54,46.74 73.54,47.38 73.54,48.01 74.17,47.38 74.17,48.01 74.17,46.11 74.17,46.74 72.9,44.84 72.9,45.47 72.27,44.84 72.27,45.47 72.27,46.11 72.27,46.74 72.27,47.38 72.27,48.01 72.9,47.38 72.9,48.01 72.9,46.11 72.9,46.74 56.88,55 56.24,55 56.88,54.36 56.24,54.36 55.61,54.36 54.97,54.36 54.34,54.36 53.7,54.36 54.34,55 53.7,55 55.61,55 54.97,55 59.14,43.34 58.5,43.34 59.14,42.7 58.5,42.7 57.87,42.7 57.23,42.7 56.6,42.7 55.96,42.7 56.6,43.34 55.96,43.34 57.87,43.34 57.23,43.34 106.91,43.34 106.28,43.34 106.91,42.7 106.28,42.7 105.64,42.7 105.01,42.7 104.37,42.7 103.74,42.7 104.37,43.34 103.74,43.34 105.64,43.34 105.01,43.34 113.06,43.34 112.43,43.34 113.06,42.7 112.43,42.7 111.79,42.7 111.16,42.7 110.52,42.7 109.89,42.7 110.52,43.34 109.89,43.34 111.79,43.34 111.16,43.34 113.42,52.79 112.78,52.79 112.15,52.79 112.78,53.42 112.15,53.42 113.42,53.42 113.72,50.63 113.09,50.63 112.45,50.63 111.82,50.63 112.45,51.26 111.82,51.26 113.72,51.26 113.09,51.26 122.49,66.27 122.49,65.64 122.49,65 122.49,64.37 121.85,65 121.85,64.37 121.85,66.27 121.85,65.64 123.12,65 123.12,64.37 123.12,66.27 123.12,65.64 122.49,68.92 122.49,68.28 122.49,67.65 122.49,67.01 121.85,67.65 121.85,67.01 121.85,68.92 121.85,68.28 123.12,67.65 123.12,67.01 123.12,68.92 123.12,68.28 80.02,47.45 80.02,48.09 79.38,47.45 79.38,48.09 79.38,48.72 79.38,49.36 79.38,49.99 79.38,50.63 80.02,49.99 80.02,50.63 80.02,48.72 80.02,49.36 78.75,47.45 78.75,48.09 78.11,47.45 78.11,48.09 78.11,48.72 78.11,49.36 78.11,49.99 78.11,50.63 78.75,49.99 78.75,50.63 78.75,48.72 78.75,49.36 25.48,47.68 61.58,82.5 144.61,45.65 81.92,1.45 114.84,17.43 30.61,19.08
  pour Bottom (rank 2, no thermals): 99.37,81.79 124.11,81.79 124.11,62.9 111.13,62.9 99.37,62.87
  pour Bottom (rank 2, no thermals): 98.63,19.64 77.43,19.64 77.43,22.08 78.54,23.2 79.99,23.2 80.42,23.63 80.42,26.14 78.34,28.23 78.34,38.18 98.63,38.18
  pour Bottom (rank 2, no thermals): 71.94,5.87 50.98,5.87 50.96,5.9 50.96,9.13 53.85,9.18 53.85,12.76 53.83,12.78 50.98,12.78 50.98,23.93 51.97,24.92 71.94,24.92
  pour Bottom (rank 2, no thermals): 32.14,57.64 32.14,76.05 50.48,76.05 50.48,57.64
  pour Top (rank 3, no thermals): -7.54,89.31 -7.54,4.58 5.14,-8.1 144.56,-8.1 158.17,5.52 158.17,88.47 150.07,96.58 -0.27,96.58
  pour Bottom (no thermals): 56.37,32.31 56.37,28 56.65,27.72 62.41,27.72 62.72,27.41 62.72,25.76 63,25.48 65.97,25.48 66.27,25.79 66.27,32.29 65.89,32.67 56.72,32.67
  pour Bottom (no thermals): 71.63,51.11 71.63,43.97 71.86,43.74 74.33,43.74 74.58,44 74.58,45.98 75.04,46.44 80.63,46.44 80.65,46.41 80.93,46.69 80.93,51.16 80.7,51.39 71.91,51.39
  pour Bottom (no thermals): 52.86,55.23 52.86,51.67 53.02,51.52 59.04,51.52 59.11,51.59 59.11,55.17 58.83,55.45 53.09,55.45
  pour Bottom (no thermals): 52.97,45.7 52.97,42.68 53.19,42.45 53.68,41.97 61.22,41.97 61.86,41.97 62.34,42.45 62.34,45.75 62.06,46.03 53.24,46.03 52.97,45.75
  pour Bottom (no thermals): 111.35,54.39 111.35,49.46 114.38,49.46 114.38,54.39
  pour Bottom (no thermals): 101.99,45.14 101.99,41.71 102.24,41.46 116.11,41.46 116.11,45.34 102.19,45.34
HV_SENSING  (via drill 0.3)
  Top 0.305: MAIN_CON.13 16.7,41.61 18.14,41.61 19.88,39.87 31.04,39.87 32.32,41.15 32.32,45.78 42.16,55.62 v43.06,55.62 | v48.12,55.62 49.54,55.62 49.73,55.81 49.73,58.6 51.15,60.02 53.24,60.02 54.34,61.12 54.34,63.78 55.86,65.31 56.8,65.31 57.68,66.19 61.09,66.19 63.86,68.97 65.82,68.97 JP3.24
  Bottom 0.305: v43.06,55.62 v48.12,55.62
I2C_SCL
  Top 0.305: MAIN_CON.2 18.98,28.65 22.79,32.46 IC3.5
I2C_SDA
  Top 0.305: MAIN_CON.1 16.76,29.67 19.43,29.67 22.72,32.96 IC3.4
JETSON_SUP  (via drill 0.3)
  other vias: 64.57,13.72 64.57,14.36 63.94,13.72 63.94,14.36 63.94,14.99 63.94,15.63 63.94,16.26 63.94,16.9 64.57,16.26 64.57,16.9 64.57,14.99 64.57,15.63 63.3,13.72 63.3,14.36 62.67,13.72 62.67,14.36 62.67,14.99 62.67,15.63 62.67,16.26 62.67,16.9 63.3,16.26 63.3,16.9 63.3,14.99 63.3,15.63 64.57,20 64.57,20.63 63.94,20 63.94,20.63 63.94,21.27 63.94,21.9 63.94,22.54 63.94,23.17 64.57,22.54 64.57,23.17 64.57,21.27 64.57,21.9 63.3,20 63.3,20.63 62.67,20 62.67,20.63 62.67,21.27 62.67,21.9 62.67,22.54 62.67,23.17 63.3,22.54 63.3,23.17 63.3,21.27 63.3,21.9
  pour Bottom (no thermals): 65.46,12.86 58.99,12.86 58.99,24.16 66.22,24.16 66.22,18.19 65.46,17.43
  pour Top (no thermals): 65.44,0.03 62.03,0.03 61.02,1.05 61.02,3 62.26,4.25 62.11,23.73 65.44,23.73
LED_KICKERBOARD  (via drill 0.3)
  Top 0.305: MAIN_CON.14 18.92,39.47 31.21,39.47 32.72,40.98 32.72,45.61 42.13,55.02 v43.06,55.02 | JP3.22 65.87,64.34 63.58,64.34 62.97,64.95 58.3,64.95 v58,64.65 | v48.12,55.02 49.52,55.02 50.13,55.64 50.13,57.04 50.98,57.88 53.75,57.88 54.74,58.88 54.74,63.4 v55.99,64.64
  Bottom 0.305: v43.06,55.02 v48.12,55.02 | v55.99,64.64 v55.99,64.65 v58,64.65
LINEAR  (via drill 0.3)
  Top 0.305: MAIN_CON.10 18.9,37.82 31.85,37.82 34.88,40.85 34.88,46.63 42.06,53.81 v43.06,53.81 | JP3.19 63.02,64.14 57.49,64.14 v56.75,63.4 | v48.12,53.81 49.44,53.81 50.98,55.34 52.36,55.34 55.71,58.7 v55.71,62.92
  Bottom 0.305: v43.06,53.81 v48.12,53.81 | v55.71,62.92 | v55.71,62.92 56.19,63.4 v56.75,63.4
M_HL_DIR  (via drill 0.3)
  Top 0.305: U$4.D_IN/D_OUT3 99.01,62.48 99.01,43.06 101.08,41 117.66,41 119.39,39.27 v119.39,39.18 | v129.13,38.16 v129.11,38.16 128.99,38.28 v122.73,38.28 v122.72,38.29
  Bottom 0.305: MAIN_CON_MOT.6 129.79,37.49 v129.13,38.16 | v122.72,38.29 121.84,39.17 v119.4,39.17 v119.39,39.18
M_HL_DOUT  (via drill 0.3)
  Top 0.305: U$4.D_IN/D_OUT4 99.44,64.59 99.44,43.21 101.25,41.4 117.89,41.4 122.11,37.17 123.09,37.17 123.32,37.4 128.17,37.4 v128.27,37.3
  Bottom 0.305: v128.27,37.3 129.95,35.62 129.95,30.81 MAIN_CON_MOT.14
M_HL_PWM  (via drill 0.3)
  Top 0.305: U$4.D_IN1 98.58,57.83 98.58,42.88 100.9,40.57 117.27,40.57 120.93,36.91 121.6,36.91 v121.63,36.94 | v128.7,37.73 128.55,37.88 123.2,37.88 123.01,37.68 v122.35,37.68
  Bottom 0.305: MAIN_CON_MOT.5 132.29,36.51 129.92,36.51 v128.7,37.73 | v122.35,37.68 121.63,36.96 v121.63,36.94
M_HR_DIR  (via drill 0.3)
  Top 0.305: MAIN_CON_MOT.8 124.39,35.49 107.95,19.05 100.58,19.05 v100.48,19.15 | U$1.D_IN/D_OUT3 73.9,16.44 78.17,16.44 78.39,16.21 v78.88,16.21 | v84.35,16.24 84.45,16.34 97.75,16.34 97.91,16.49 v98.21,16.49
  Bottom 0.305: v84.35,16.24 84.33,16.21 v78.88,16.21 | v98.21,16.49 98.21,17.85 98.99,18.63 99.83,18.63 100.35,19.15 v100.48,19.15
M_HR_DOUT  (via drill 0.3)
  Top 0.305: MAIN_CON_MOT.10 130.11,34.66 124.7,34.66 108.25,18.21 101.83,18.21 v101.61,17.98 | U$1.D_IN/D_OUT4 76.01,16.01 78.02,16.01 78.42,15.61 v78.88,15.61 | v98.2,15.86 98.2,15.91 84.76,15.91 84.48,15.63 v84.35,15.63
  Bottom 0.305: v98.2,15.86 98.58,15.86 98.94,16.21 99.85,16.21 101.61,17.96 v101.61,17.98 | v84.35,15.63 84.33,15.61 v78.88,15.61
M_HR_PWM  (via drill 0.3)
  Top 0.305: MAIN_CON_MOT.7 133.02,35.49 132.03,34.5 130.89,34.5 130.3,35.09 124.55,35.09 108.1,18.63 98.13,18.63 96.67,17.17 84.78,17.17 84.51,17.45 v84.35,17.45 | U$1.D_IN1 73.49,18.93 77.43,18.93 v78.88,17.48
  Bottom 0.305: v78.88,17.48 78.91,17.45 v84.35,17.45
M_VL_DIR  (via drill 0.3)
  Top 0.305: U$3.D_IN/D_OUT3 30.28,62.5 30.28,60.32 37.05,53.55 v37.47,53.55 | v41.18,49.92 41.18,49.72 49.86,41.03 49.86,40.08 50.38,39.55 50.81,39.55 53.14,37.22 v53.4,37.22 | v72.24,39.68 72.07,39.68 70.15,37.76 v69.2,37.76 | v92.41,38.44 92.56,38.28 97.75,38.28 99.22,39.76 116.94,39.76 119.17,37.52 v119.17,37.38 | v129.25,38.87 122.57,38.87 121.87,38.17 v121.87,38.13
  Bottom 0.305: v41.18,49.92 41.1,49.92 v37.47,53.55 | v72.24,39.68 79.08,39.68 80.81,37.95 91.65,37.95 92.13,38.44 v92.41,38.44 | MAIN_CON_MOT.4 130.65,38.87 v129.25,38.87 | v121.87,38.13 121.13,37.39 119.18,37.39 v119.17,37.38 | v69.2,37.76 69.07,37.76 68.54,37.22 v53.4,37.22
M_VL_DOUT  (via drill 0.3)
  Top 0.305: U$3.D_IN/D_OUT4 30.69,64.63 30.69,60.49 37.1,54.07 v38.02,54.07 | v41.7,50.44 41.7,49.8 50.31,41.19 50.31,40.2 50.55,39.96 51.06,39.96 53.19,37.83 v53.4,37.83 | v72.07,40.26 72.07,40.24 70.18,38.36 v69.2,38.36 | v92.36,39.1 92.72,39.1 93.1,38.72 97.61,38.72 99.06,40.16 117.1,40.16 120.84,36.43 122.95,36.43 123.46,36.95 127.77,36.95 v127.84,36.87
  Bottom 0.305: MAIN_CON_MOT.16 129.55,29.22 129.55,35.17 v127.84,36.87 | v38.02,54.07 41.65,50.44 v41.7,50.44 | v72.07,40.26 72.09,40.23 79.1,40.23 80.97,38.36 91.32,38.36 92.06,39.1 v92.36,39.1 | v69.2,38.36 68.92,38.36 68.21,37.65 53.73,37.65 53.55,37.83 v53.4,37.83
M_VL_PWM  (via drill 0.3)
  Top 0.305: U$3.D_IN1 31.05,58.98 v36.99,53.04 | v40.67,49.41 40.9,49.41 49.46,40.85 49.46,39.91 50.22,39.15 50.64,39.15 53.17,36.62 v53.4,36.62 | v92.49,37.7 92.61,37.83 97.87,37.83 99.39,39.35 116.64,39.35 118.07,37.92 v118.07,37.91 | v72.19,39.07 72.04,39.07 70.12,37.15 v69.2,37.15 | v129.22,39.47 122.28,39.47 v121.4,38.6
  Bottom 0.305: MAIN_CON_MOT.1 132.25,40.47 130.21,40.47 v129.22,39.47 | v36.99,53.04 40.62,49.41 v40.67,49.41 | v72.19,39.07 79.08,39.07 80.6,37.55 92.34,37.55 v92.49,37.7 | v121.4,38.6 120.71,37.91 v118.07,37.91 | v69.2,37.15 68.81,36.77 53.65,36.77 53.5,36.62 v53.4,36.62
M_VR_DIR  (via drill 0.3)
  Top 0.305: MAIN_CON_MOT.2 129.88,40.09 129.88,38.19 129.61,37.92 129.14,37.45 128.48,36.79 128,36.32 124.07,36.32 107.64,19.89 102.57,19.89 v102.5,19.96
  Bottom 0.305: U$2.D_IN/D_OUT3 99.47,15.13 102.11,17.78 102.11,19.58 v102.5,19.96
M_VR_DOUT
  Top 0.305: MAIN_CON_MOT.12 131.15,31.49 128.84,33.8 124.99,33.8 108.56,17.38 107.7,17.38 105.21,17.38 100.23,12.4 U$2.D_IN/D_OUT4
M_VR_PWM
  Top 0.305: MAIN_CON_MOT.3 132.33,38.55 130.87,38.55 128.5,36.18 128.23,35.91 124.24,35.91 107.78,19.46 100.9,19.46 100.33,20.02 U$2.D_IN1
MOTOR_D_A
  Top 1.168: U$6.MW1/+ 87.08,47.3 87.08,68.41 85.05,70.44 75.65,70.44 73.11,72.97 JP1.8
MOTOR_D_B
  Top 1.168: JP1.7 75.65,73.73 77.68,71.71 85.57,71.71 88.35,68.93 88.35,48.61 U$6.MW2/-
MOTOR_D_C
  Top 1.168: U$6.MW3/NC 89.61,49.88 89.61,69.46 86.1,72.98 79.33,72.98 78.19,74.12 JP1.6
MOTOR_D_H1
  Top 0.61: U$6.H1 91.31,58.35 91.31,70.16 85.81,75.66 JP1.3
MOTOR_D_H2
  Top 0.61: JP1.2 88.35,74.12 92.02,70.46 92.02,60.18 U$6.H2
MOTOR_D_H3
  Bottom 0.61: U$6.H3 92.01,62.73 92.01,70.47 90.89,71.58 JP1.1
MOTOR_D_VHALL
  Top 0.61: JP1.5 80.73,75.46 82.23,73.97 86.51,73.97 90.6,69.87 90.6,56.52 U$6.+5V
MOTOR_HL_A  (via drill 1.17)
  Top 1.168: U$4.MW1/+ 115.27,46.17 115.27,73.78 118.03,76.53 123.78,76.53 128.52,71.8 128.52,69.75 v131.26,67.01
  pour Top (no thermals): 131.59,68.24 127.52,65.65 128.44,64.2 132.51,66.79
MOTOR_HL_B  (via drill 1.17)
  Top 1.168: U$4.MW2/- 116.67,47.36 116.67,73.12 118.18,74.63 123.4,74.63 v126.83,71.2
  Bottom 1.168: v132.32,65.34 130.36,65.34 126.83,68.86 v126.83,71.2
  pour Top (no thermals): 132.65,66.57 128.58,63.98 129.5,62.53 133.57,65.12
MOTOR_HL_C  (via drill 1.17)
  Top 1.168: U$4.MW3/NC 118.07,48.5 118.07,72.47 118.95,73.36 121.75,73.36 v125.18,69.93
  Bottom 1.168: v133.39,63.67 129.97,63.67 125.18,68.46 v125.18,69.93
  pour Top (no thermals): 133.73,64.88 129.66,62.28 130.58,60.84 134.65,63.43
MOTOR_HL_H1  (via drill 0.41)
  Top 0.406: U$4.H1 121.92,56.44 125,53.36 125,48.38 130.39,42.99 135.78,42.99 139.71,46.92 139.71,55.25 137.82,57.14 MOTOR_HL_CON.6
  other vias: 134.4,57.14
MOTOR_HL_H2  (via drill 0.41)
  Bottom 0.406: U$4.H2 120.29,58.12 121.65,56.76 121.65,50.96 130.12,42.49 135.27,42.49 140.95,48.16 140.95,55.91 138,58.86 133.36,58.86 MOTOR_HL_CON.5
  other vias: 133.32,58.83
MOTOR_HL_H3  (via drill 0.41)
  Bottom 0.406: U$4.H3 121.52,60.29 121.52,57.7 122.15,57.07 122.15,51.17 130.33,42.99 135.06,42.99 139.25,47.18 139.25,50.12 135.47,53.89 MOTOR_HL_CON.7
  other vias: 135.47,55.45
MOTOR_HL_VHALL  (via drill 0.41)
  Top 0.406: U$4.+5V 123.59,53.9 124.43,53.06 124.43,48.13 130.08,42.49 135.99,42.49 140.31,46.81 v140.31,48.39
  Bottom 0.406: v140.31,48.39 140.31,52.28 138.83,53.77 MOTOR_HL_CON.8
  other vias: 136.55,53.77
MOTOR_HR_A  (via drill 1.17)
  Top 1.168: v19.67,10.02 23.95,10.02 26.83,7.15 v26.83,3.69 | U$1.MW1/+ 56.47,30.91 56.47,6.25 v56.47,5.93
  Bottom 1.168: v26.83,3.69 45.77,3.69 46.91,2.55 54.72,2.55 56.43,4.26 56.43,5.88 v56.47,5.93
  pour Top (no thermals): 19.67,8.74 22.93,12.3 21.67,13.46 18.41,9.9
MOTOR_HR_B  (via drill 1.17)
  Top 1.168: U$1.MW2/- 54.89,29.91 54.89,4.93 v54.87,4.91
  Bottom 1.168: v18.21,11.36 18.8,11.94 20.05,11.94 26.74,5.25 46,5.25 47.44,3.82 53.78,3.82 v54.87,4.91
  pour Top (no thermals): 18.21,10.08 21.47,13.64 20.21,14.8 16.95,11.24
MOTOR_HR_C  (via drill 1.17)
  Top 1.168: U$1.MW3/NC 52.96,29.3 52.96,5.55 v53.02,5.49
  Bottom 1.168: v16.75,12.7 v16.76,12.7 17.28,13.21 20.57,13.21 26.97,6.81 46.23,6.81 47.96,5.09 52.61,5.09 v53.02,5.49
  pour Top (no thermals): 16.73,11.44 19.99,14.99 18.73,16.15 15.47,12.59
MOTOR_HR_H1  (via drill 0.41)
  Top 0.406: v26.14,28.07 31.07,28.07 35.03,24.11 41.25,24.11 43.46,21.89 48.87,21.89 U$1.H1
  Bottom 0.406: MOTOR_HR_CON.6 12.99,19.89 12.99,22 20.25,29.27 22.59,29.27 23.78,28.07 v26.14,28.07
  other vias: 14.11,18.77
MOTOR_HR_H2  (via drill 0.41)
  Top 0.406: v26.14,27.36 31.03,27.36 34.82,23.57 41.04,23.57 44.59,20.02 U$1.H2
  Bottom 0.406: MOTOR_HR_CON.5 15.59,18.31 13.49,20.4 13.49,21.79 20.46,28.76 22.38,28.76 23.77,27.36 v26.14,27.36
  other vias: 15.59,17.42
MOTOR_HR_H3
  Top 0.406: MOTOR_HR_CON.7 12.64,20.94 20.46,28.76 22.38,28.76 24.45,26.68 30.96,26.68 34.58,23.07 40.83,23.07 46.42,17.48 U$1.H3
MOTOR_HR_VHALL
  Top 0.406: MOTOR_HR_CON.8 12.45,21.47 20.25,29.27 22.59,29.27 23.16,28.69 31.16,28.69 35.24,24.61 41.46,24.61 43.15,22.91 47.35,22.91 U$1.+5V
MOTOR_VL_A  (via drill 1.17)
  Top 1.168: v31.21,67.23 38.97,67.23 44,62.19 44,48.73 49.8,42.94 U$3.MW1/+
  Bottom 1.168: v10.28,55.12 9.07,56.33 9.07,60.74 17.2,68.86 29.57,68.86 v31.21,67.23
  pour Top (no thermals): 9.03,54.9 13.1,52.31 14.02,53.75 9.95,56.35
MOTOR_VL_B  (via drill 1.17)
  Top 1.168: v11.35,56.8 9.94,58.2 9.94,61.57 17.21,68.84 25.15,68.84 28.73,72.42 35.57,72.42 45.27,62.72 45.27,50.05 U$3.MW2/-
  pour Top (no thermals): 10.09,56.57 14.16,53.98 15.08,55.42 11.01,58.02
MOTOR_VL_C  (via drill 1.17)
  Top 1.168: v12.41,58.47 11.46,59.42 11.46,60.91 17.99,67.45 25.62,67.45 29.04,70.86 v29.37,70.86 | U$3.MW3/NC 46.54,51.32 46.54,63.24 36.09,73.69 29.64,73.69 v29.34,73.98
  Bottom 1.168: v29.37,70.86 29.37,73.95 v29.34,73.98
  pour Top (no thermals): 11.17,58.26 15.24,55.67 16.16,57.12 12.09,59.71
MOTOR_VL_H1  (via drill 0.41)
  Top 0.406: MOTOR_VL_CON.6 16.36,63.67 v16.36,64.42
  Bottom 0.406: v16.36,64.42 16.36,66.06 17.78,67.47 23.73,67.47 25.94,65.26 29.22,65.26 30.71,63.77 30.71,60.5 32.88,58.32 34.58,58.32 35.92,56.98 35.92,56.95 36.18,56.7 49.5,56.7 49.76,56.44 U$3.H1
MOTOR_VL_H2  (via drill 0.41)
  Top 0.406: MOTOR_VL_CON.5 15.76,61.52 v15.76,63.81
  Bottom 0.406: v15.76,63.81 15.76,66.16 17.57,67.98 29.04,67.98 29.92,67.1 29.92,65.28 31.22,63.98 31.22,60.7 33.09,58.83 34.79,58.83 36.41,57.2 49.8,57.2 U$3.H2
MOTOR_VL_H3  (via drill 0.41)
  Top 0.406: MOTOR_VL_CON.7 18.11,63.89 v16.97,65.03 | v34.27,57.69 39.96,57.69 v40.09,57.82
  Bottom 0.406: v16.97,65.03 16.97,65.95 17.99,66.97 23.52,66.97 27.76,62.72 29.26,62.72 30.21,61.78 30.21,60.28 32.8,57.69 v34.27,57.69 | U$3.H3 47.77,57.71 40.19,57.71 v40.09,57.82
MOTOR_VL_VHALL  (via drill 0.41)
  Top 0.406: MOTOR_VL_CON.8 20.77,66.36 v21.19,66.36
  Bottom 0.406: v21.19,66.36 23.41,66.36 27.21,62.56 27.21,61.07 28.09,60.18 29.59,60.18 33.59,56.19 49.29,56.19 U$3.+5V
MOTOR_VR_A  (via drill 1.17)
  Top 1.168: v95.1,9.64 87.66,9.64 83.42,13.88 83.42,31.04 U$2.MW1/+
  Bottom 1.168: v139.64,19.47 140.14,18.98 140.14,14.74 133.84,8.44 127.29,8.44 121.78,2.93 102.94,2.93 96.22,9.64 v95.1,9.64
  pour Top (no thermals): 140.91,19.36 137.65,22.92 136.39,21.76 139.65,18.21
MOTOR_VR_B  (via drill 1.17)
  Top 1.168: U$2.MW2/- 82.02,29.85 82.02,25.05 82.02,25.02 82.02,13.36 87.3,8.08 100.73,8.08 v100.74,8.09 | v117.58,4.58 123.34,4.58 127.3,8.54 132.51,8.54 138.71,14.74 138.71,17.62 138.2,18.14 v138.18,18.14
  Bottom 1.168: v100.74,8.09 100.74,8.01 104.17,4.58 v117.58,4.58
  pour Top (no thermals): 139.45,18.03 136.19,21.58 134.93,20.43 138.19,16.87
MOTOR_VR_C  (via drill 1.17)
  Top 1.168: v136.72,16.8 136.95,16.57 136.95,15.16 131.63,9.84 126.8,9.84 123.12,6.15 v118.98,6.15 | v105.82,6.48 86.98,6.48 80.63,12.83 80.63,28.7 U$2.MW3/NC
  Bottom 1.168: v118.98,6.15 106.15,6.15 v105.82,6.48
  pour Top (no thermals): 137.97,16.67 134.71,20.23 133.45,19.07 136.71,15.51
MOTOR_VR_H1  (via drill 0.3, 0.41)
  Top 0.406: v86.9,14.92 86.9,14.39 89.07,12.21 96.99,12.21 98.01,11.2 99.97,11.2 100.67,11.9 100.67,12.15 105.44,16.92 108.75,16.92 120.36,28.53 v120.43,28.53
  Bottom 0.406: U$2.H1 77.7,21.47 77.7,19.64 78.22,19.12 85.01,19.12 86.9,17.24 v86.9,14.92 | MOTOR_VR_CON.6 131.5,14.71 136.2,19.41 136.2,22.12 135.28,23.04 134.27,23.04 128.78,28.53 v120.43,28.53
  other vias: 130.47,14.71
MOTOR_VR_H2  (via drill 0.41)
  Top 0.406: v86.19,14.95 86.19,14.38 88.86,11.71 96.76,11.71 97.78,10.69 100.18,10.69 101.18,11.69 101.18,11.94 105.65,16.42 108.96,16.42 120.52,27.98 129.33,27.98 v134.88,22.43
  Bottom 0.406: U$2.H2 78.01,18.62 84.8,18.62 86.19,17.23 v86.19,14.95 | MOTOR_VR_CON.5 131.95,17.16 135.69,20.9 135.69,21.65 134.91,22.43 v134.88,22.43
  other vias: 131.95,16.06
MOTOR_VR_H3  (via drill 0.41)
  Top 0.406: v85.48,14.95 85.48,14.35 88.62,11.2 96.55,11.2 97.57,10.18 101.19,10.18 v101.78,10.77
  Bottom 0.406: U$2.H3 77.24,18.11 84.59,18.11 85.48,17.23 v85.48,14.95 | MOTOR_VR_CON.7 127.56,13.36 122.04,7.84 119.15,7.84 116.26,10.72 101.83,10.72 v101.78,10.77
  other vias: 129,13.36
MOTOR_VR_VHALL  (via drill 0.41)
  Top 0.406: U$2.+5V 77.7,24 77.7,20.33 78.31,19.72 78.94,19.72 v78.95,19.73 | v87.63,14.9 87.63,14.37 89.17,12.83 v96.75,12.83
  Bottom 0.406: MOTOR_VR_CON.8 122.84,7.33 118.49,7.33 118.2,7.04 107.15,7.04 104.6,9.58 99.88,9.58 96.75,12.71 v96.75,12.83 | v78.95,19.73 85.12,19.73 87.63,17.22 v87.63,14.9
  other vias: 127.52,12.01
N$1
  Top 2.794: S1.3 33.61,11.41 33.76,11.41 34.69,12.34 34.69,19.44 BAT+.P$1
N$4
  Top 0.813: R35.1 LED1.A
N$7
  Bottom 0.61: JP1.4 83.27,75.34 84.66,73.94 86.47,73.94 90.58,69.83 90.58,54 U$6.GND
N$14
  Top 0.813: R32.1 LED4.A
N$15
  Top 0.813: R33.1 LED3.A
N$30
  Top 0.813: R34.1 LED2.A
SW_3V3  (via drill 0.51)
  Top 0.508: v114.21,67.57 110.5,67.57 106.71,63.78 v106.71,48.7
  Bottom 0.457: IC6.1 115.42,69.03 C59.1 | L9.1 104.12,48.68
  Bottom 0.508: C59.1 114.39,67.57 v114.21,67.57 | v106.71,48.7 106.7,48.68 104.12,48.68
SW_5V  (via drill 0.51)
  Top 0.508: v31.76,74.75 31.76,76.79 34.78,79.81 45.49,79.81 v47.04,81.36 | v31.68,69.42 33.93,69.42 C31.1
  Bottom 0.508: v31.68,69.42 31.68,74.68 v31.76,74.75 | v47.04,81.36 54.58,81.36 L8.1 | C31.1 34.17,69.23 IC7.1
  other vias: 33.95,69.45
SW_12V_1
  Bottom 0.457: IC4.1 87.42,21.78 C10.1 86.75,21.5 85.17,23.08 85.17,31.45 84.83,31.8 L3.1
SW_12V_2
  Bottom 0.457: IC5.1 60.72,8.41 C19.1 58.37,10.39 58.37,18.05 57.97,18.45 L5.1
V_INA
  Top 0.305: IC3.6 27.14,32.46 26.73,32.87 26.73,35.72 L1.1 C6.1
VCC  (via drill 0.3, 1.27)
  Top 0.305: IC3.9 29.63,33.96 v29.65,33.94
  Top 0.813: R35.2 115.65,7.42 VCC-TEST.1
  other vias: 40.32,41.89 58.76,59.8 38.64,82.73 112.53,83.29 84.46,1.38
  pour Bottom (rank 3, no thermals): -7.99,89.97 -7.99,4.22 4.86,-8.63 144.94,-8.63 158.83,5.26 158.83,88.8 150.25,97.39 -0.58,97.39
VCC_3V3
  Bottom 0.457: IC6.3 112.88,69.76 C27.1
VCC_5V
  Bottom 0.457: IC7.3 36.71,68.68 C30.1
VCC_12V_1
  Bottom 0.457: IC4.3 87.53,24.32 C9.1
VCC_12V_2
  Bottom 0.457: C18.1 60.51,10.95 IC5.3
VIN_3V3
  Bottom 0.457: IC6.5 111.61,79.33 111.99,79.71 114.15,79.71 | IC6.7 114.15,79.71 | C26.1 116.65,66.2 118.32,67.86 118.32,78.11 116.72,79.71 114.15,79.71
  Bottom 1.092: C26.1 115.61,64.69 115.09,64.17
  Bottom 1.295: L6.2 115.09,64.04 | 115.09,64.04 115.09,64.17 | 115.09,64.04 C25.1
VIN_5V
  Bottom 0.457: IC7.5 37.98,59.98 37.5,59.49 35.44,59.49 | C29.1 33.22,72.37 32.42,71.57 32.42,60.64 33.56,59.49 35.44,59.49 | IC7.7 35.44,59.49
  Bottom 1.092: C28.1 34.08,74.44 C29.1
  Bottom 1.295: L7.2 34.27,74.93 C28.1
VIN_12V_1
  Bottom 0.457: C8.1 84.88,20.53 96.73,20.53 97.47,21.27 97.47,23.05 | IC4.7 97.47,23.05 | 97.47,23.05 97.47,25.25 97.13,25.59 IC4.5
  Bottom 1.092: C7.1 82.33,21.51 C8.1
  Bottom 1.295: L2.2 81.5,22 C7.1
VIN_12V_2
  Bottom 0.457: C17.1 57.93,7.3 70.69,7.3 70.92,7.52 70.92,9.68 | IC5.7 70.92,9.68 | 70.92,9.68 70.92,11.71 70.42,12.22 IC5.5
  Bottom 1.092: C16.1 55.62,8.1 C17.1
  Bottom 1.295: L4.2 54.9,8.52 C16.1